# Altium PCB CSMS.PcbDoc
Units mm, origin at the board's own origin, x right, y up, seen from the top; angles counter-clockwise.
Board outline 20 x 87 mm, 2 copper layers (Top Layer, Bottom Layer), stack 1.671 mm thick; 17 components, 10 nets, 46 pads, 144 vias.
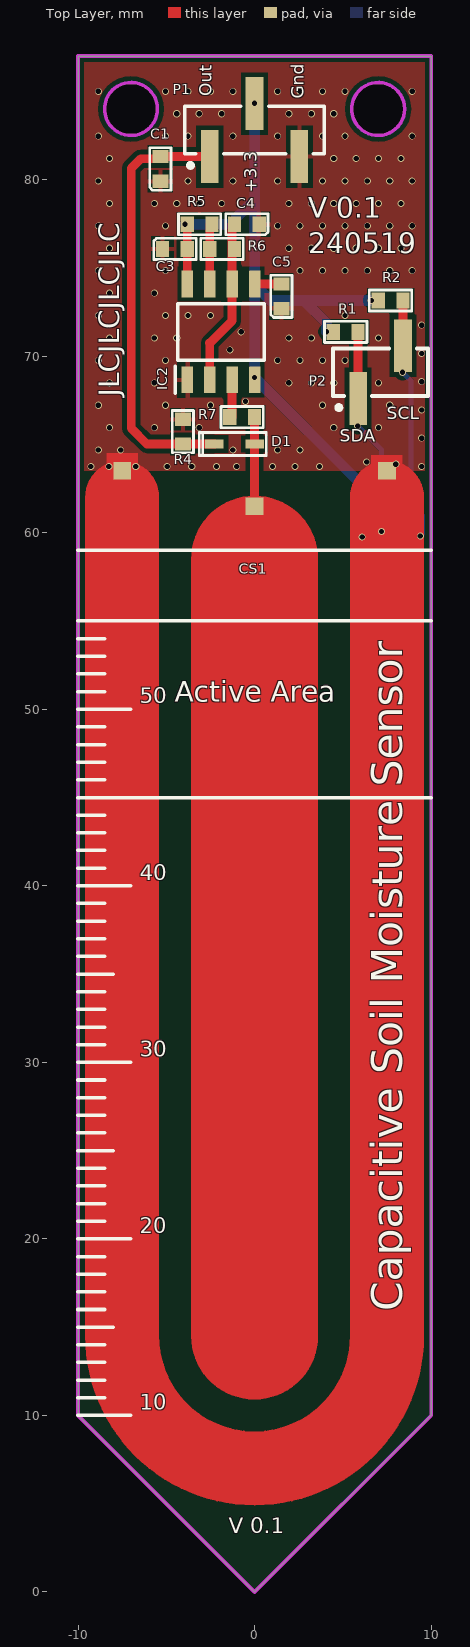
[diagram p0: Top Layer view]
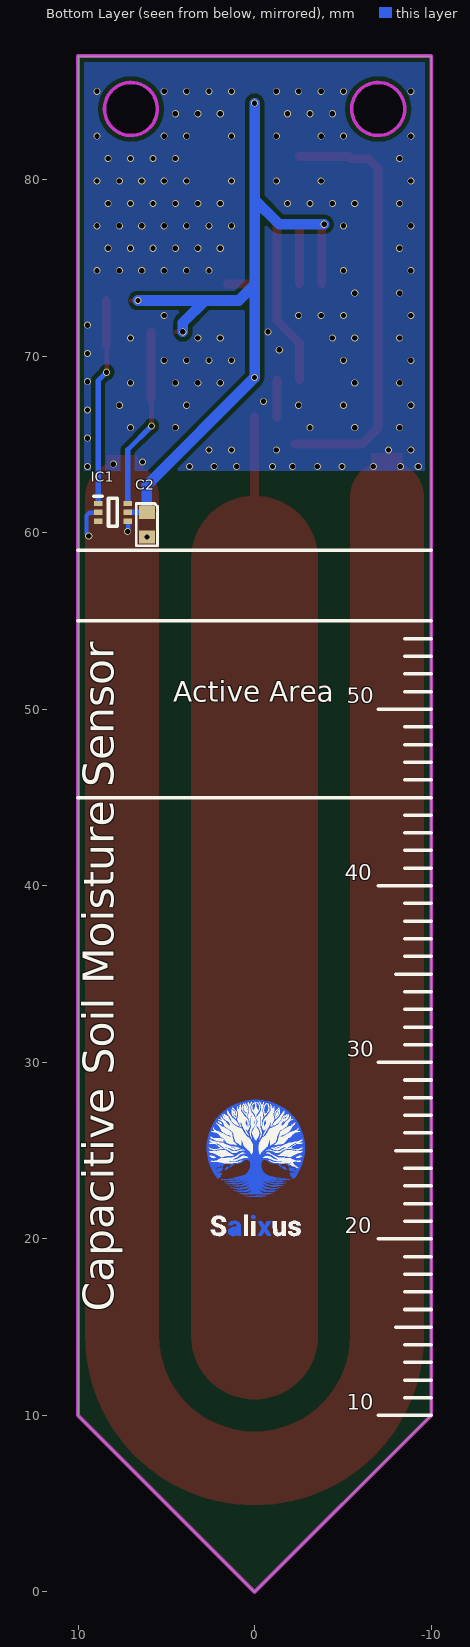
[diagram p1: Bottom Layer view, seen from below]
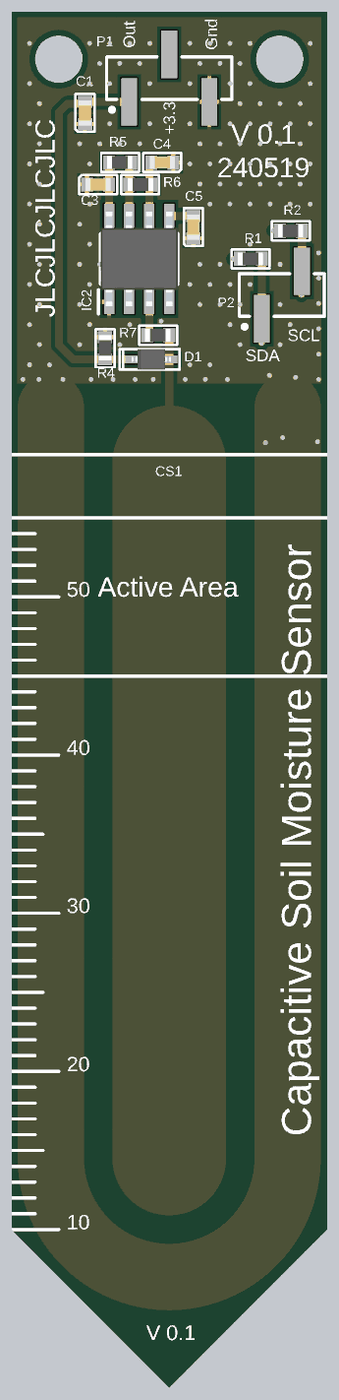
[diagram p2: 3D render of the assembled board from above, using the file's embedded part models]

## Layer stack, top to bottom
Top Solder: solder mask 0.0102, Solder Resist, Dk 3.5
Top Layer: signal copper 0.0356
Dielectric 1: dielectric 1.6, FR-4, Dk 4.8
Bottom Layer: signal copper 0.0356
Bottom Solder: solder mask 0.0102, Solder Resist, Dk 3.5

## Board outline
0,0 -10,10 -10,87 10,87 10,10
cut-out: 7,82.5 cw(c7,84) 5.5,84 cw(c7,84) 7,85.5 cw(c7,84) 8.5,84 cw(c7,84)
cut-out: -7,82.5 cw(c-7,84) -8.5,84 cw(c-7,84) -7,85.5 cw(c-7,84) -5.5,84 cw(c-7,84)

## Design rules (kind name [scope] priority, off if disabled: settings)
Clearance [All] p1: gap=0.254 ignorepadtopadclearanceinfootprint=FALSE except(0: Arc-Hole Track-Hole SMDPad-Hole THPad-Hole Via-Hole Fill-Hole Poly-Hole Region-Hole Text-Hole)
PolygonConnect [All] p1: thpad.connectstyle=Relief thpad.reliefconductorwidth=0.254 thpad.reliefentries=4 thpad.polygonreliefangle="90 Angle" thpad.airgapwidth=0.254 smdpad.connectstyle=Relief smdpad.reliefconductorwidth=0.254 smdpad.reliefentries=4 smdpad.polygonreliefangle="90 Angle" smdpad.airgapwidth=0.254 via.connectstyle=Direct via.reliefconductorwidth=0.254 via.reliefentries=4 via.polygonreliefangle="90 Angle" via.airgapwidth=0.254
RoutingVias [All] p1: holewidth=0.3 width=0.4 viastyle="Through Hole" minholewidth=0.3 minwidth=0.4 maxholewidth=0.711 maxwidth=1.27
SolderMaskExpansion [All] p1: expansion=0.102 istentingtop=FALSE
UnRoutedNet [All] p1: checkbadconnections=TRUE
Width [All] p1: maxlimit=1 minlimit=0.254 preferedwidth=0.3 minimp=50.000000 maximp=50.000000 favimp=50.000000
29 further rules are at their usual default settings.

## Classes and differential pairs
component class CSMS: C1 C2 C3 C4 C5 CS1 D1 IC1 IC2 R1 R2 R4 R5 R6 R7

## Components (designator, comment, footprint, x,y, rotation, side; value= is the part's Value field where it differs from the comment)
C1 "CL10B105KA8NNNC" "0603 CAP" -5.334,80.604 r90 top value="1uF 25VDC"
C2 "CL10B104KB8NNNC" "0603 CAP" 6.096,60.452 r270 bottom value="100nF 50VDC"
C3 "CL10B104KB8NNNC" "0603 CAP" -4.51,76.073 r0 top value="100nF 50VDC"
C4 "CL10B471KB8NNNC" "0603 CAP" -0.44,77.47 r180 top value="470pF 50VDC"
C5 "CC0603KRX7R9BB103" "0603 CAP" 1.524,73.386 r90 top value="10nF 50VDC"
CS1 "Sens" SENS 0,34.5 r0 top
D1 "1N4148WS-E3-08" SOD2513X110N -1.138,65.024 r0 top
IC1 "TMP102AIDRLR" SOTFL50P160X60-6N 8.023,61.152 r180 bottom
IC2 "TLC555CDR" SOIC127P600X175-8N -1.905,71.374 r90 top
P1 "61000318221" 61000318221 0,82.804 r0 top
P2 "61000218221" 61000218221 7.134,69.088 r0 top
R1 "0603WAF5101T5E" "0603 RES" 5.164,71.374 r180 top value="5.1K %1"
R2 "0603WAF5101T5E" "0603 RES" 7.704,73.152 r180 top value="5.1K %1"
R4 "0603SAF1004T5E" "0603 RES" -4.064,65.724 r90 top value="1M %1"
R5 "0603SAF3300T5E" "0603 RES" -3.11,77.47 r180 top value="330R %1"
R6 "0603SAF1601T5E" "0603 RES" -1.84,76.073 r0 top value="1.6K %1"
R7 "0603SAF1002T5E" "0603 RES" -0.7,66.548 r180 top value="10K %1"

## Footprints (in the part's own frame and the unit in brackets; to place one, negate y for a bottom-side part, rotate by r counter-clockwise, add the part's x,y. Pads: shape width x height; smd on the part's side, far side on the other; paste and mask are expansions set on the pad)
"0603 CAP" [mm]
  rect 0.75x0.9 smd: 1(-0.7,0) 2(0.7,0)
  silkscreen extent -1.2,-0.6 1.2,0.6, body extent -0.8,-0.4 0.8,0.4, height 0.8
"0603 RES" [mm]
  rect 0.75x0.9 smd: 1(-0.7,0) 2(0.7,0)
  silkscreen extent -1.2,-0.6 1.2,0.6, body extent -0.77,-0.4 0.83,0.4, height 0.45
61000218221 [mm] "Pin Header, pitch 2.54 mm, SMD, Vertical, single row, 2p"
  rect 1x3 smd: 1(-1.27,-1.5) 2(1.27,1.5)
  silkscreen extent -2.69,-2.12 2.69,1.35
61000318221 [mm] "Pin Header, pitch 2.54 mm, SMD, Vertical, single row, 6p"
  rect 1x3 smd: 1(-2.54,-1.5) 2(0,1.5) 3(2.54,-1.5)
  silkscreen extent -3.96,-2.12 3.96,1.35
SENS [mm]
  rect 1x1 smd paste-2539.97 mask+0.102: 1(0,27) 2(-7.5,29) 2(7.5,29)
  Top Layer region: -3.5,-20 -3.153,-21.519 -2.182,-22.736 -0.779,-23.412 0.779,-23.412 2.182,-22.736 3.153,-21.519 3.5,-20 3.5,-20 3.5,24 3.153,25.519 2.182,26.736 0.779,27.412 -0.779,27.412 -2.182,26.736 -3.153,25.519 -3.5,24 -3.5,24
  Top Layer region: -9.5,-20 -9.5,27.5 -9.302,28.368 -8.747,29.064 -7.945,29.45 -7.055,29.45 -6.253,29.064 -5.698,28.368 -5.5,27.5 -5.5,27.5 -5.5,-20 -4.955,-22.386 -3.429,-24.3 -1.224,-25.362 1.224,-25.362 3.429,-24.3 4.955,-22.386 5.5,-20 5.5,-20 5.5,27.5 5.698,28.368 6.253,29.064 7.055,29.45 7.945,29.45 8.747,29.064 9.302,28.368 9.5,27.5 9.5,27.5 9.5,-20 8.559,-24.122 5.923,-27.427 2.114,-29.262 -2.114,-29.262 -5.923,-27.427 -8.559,-24.122 -9.5,-20
  Top Layer lines w0.2: -9.5,-20 ccw(c0,-20) 9.5,-20 9.5,25.317 9.5,27.5 ccw(c7.5,27.5) 5.5,27.5 5.5,-20 cw(c0,-20) -5.5,-20 -5.5,27.5 ccw(c-7.5,27.5) -9.5,27.5 -9.5,-20 ; -3.5,-20 ccw(c0,-20) 3.5,-20 3.5,24 ccw(c0,24) 0,27.5 ccw(c0,24) -3.5,24 -3.5,-20
SOD2513X110N [mm]
  rect 1.05x0.5 smd: 1(-1.138,0) 2(1.138,0)
  silkscreen extent -2,-0.65 1.8,0.65, body extent -1.25,-0.65 1.25,0.65, height 1.1
SOIC127P600X175-8N [mm]
  rect 1.525x0.65 smd: 1(-2.712,1.905) 2(-2.712,0.635) 3(-2.712,-0.635) 4(-2.712,-1.905) 5(2.712,-1.905) 6(2.712,-0.635) 7(2.712,0.635) 8(2.712,1.905)
  silkscreen extent -3.47,-2.45 1.6,2.58, body extent -3,-2.45 3,2.45, height 1.75
SOTFL50P160X60-6N [mm]
  rect 0.475x0.3 smd: 1(-0.838,0.5) 2(-0.838,0) 3(-0.838,-0.5) 4(0.838,-0.5) 5(0.838,0) 6(0.838,0.5)
  silkscreen extent -1.07,-0.8 0.25,0.9, body extent -0.8,-0.8 0.8,0.8, height 0.6

## Part data
C1: "1uF 25VDC ±10% X7R MLCC 0603", Ozdisan Price/Stock=https://ozdisan.com/Product/Detail/522144/CL10A106MO8NQNC, Supplier 1=Ozdisan, Supplier 2=Digi-Key, Supplier Part Number 1=CL10B105KA8NNNC, Supplier Part Number 2=1276-1184-1-ND
C2 C3: "100nF 50VDC ±10% X7R MLCC 0603", Supplier Part Number 1=1276-1000-1-ND, Ozdisan Price/Stock=https://ozdisan.com/Product/Detail/522144/CL10A106MO8NQNC, Supplier 1=Digi-Key
C4: "470pF 50VDC ±10% X7R MLCC 0603", Supplier Part Number 1=187-CL10B471KB8NNNC, Ozdisan Price/Stock=https://ozdisan.com/Product/Detail/522144/CL10A106MO8NQNC, Supplier 1=Mouser
C5: "10nF, 50 V, ± 10%, X7R, 0603, Multilayer Ceramic Capacitor,", Supplier Part Number 1=603-CC603KRX7R9BB103, Ozdisan Price/Stock=https://ozdisan.com/Product/Detail/522144/CL10A106MO8NQNC, Supplier 1=Mouser
CS1: "Pcb Sens"
D1: "Diode", Manufacturer_Name=Vishay, Mouser Part Number=78-1N4148WS-E3-08, Arrow Part Number=1N4148WS-E3-08, Arrow Price/Stock=https://www.arrow.com/en/products/1n4148ws-e3-08/vishay?region=europe, Datasheet Link=https://datasheet.datasheetarchive.com/originals/distributors/Datasheets-DGA23/1390442.pdf, Height=1.15mm, Manufacturer_Part_Number=1N4148WS-E3-08, Mouser Price/Stock=https://www.mouser.co.uk/ProductDetail/Vishay-Semiconductors/1N4148WS-E3-08?qs=bTzheeSci6R8fv1OBRENhQ%3D%3D, Supplier 1=Mouser, Supplier Part Number 1=78-1N4148WS-E3-08
IC1: "Integrated Circuit", Manufacturer_Name="Texas Instruments", Mouser Part Number=595-TMP102AIDRLR, Arrow Part Number=TMP102AIDRLR, Arrow Price/Stock=https://www.arrow.com/en/products/tmp102aidrlr/texas-instruments?region=nac, Datasheet Link=http://www.ti.com/lit/gpn/tmp102, Height=0.6mm, Manufacturer_Part_Number=TMP102AIDRLR, Mouser Price/Stock=https://www.mouser.co.uk/ProductDetail/Texas-Instruments/TMP102AIDRLR?qs=SUwrw6jWmlKK8eMrKfK4LA%3D%3D
IC2: "555 Astable 2.1-MHz, 250-µA, Low-Power Timer 8-SOIC 0 to 70", Manufacturer_Name="Texas Instruments", Mouser Part Number=595-TLC555CDR, Arrow Part Number=TLC555CDR, Arrow Price/Stock=https://www.arrow.com/en/products/tlc555cdr/texas-instruments?region=nac, Datasheet Link=https://www.ti.com/lit/ds/symlink/tlc555.pdf?ts=1599218356509&ref_url=https%253A%252F%252Fwww.ti.com%252Fstore%252Fti%252Fen%252Fp%252Fproduct%252F%253Fp%253DTLC555CDR%2526keyMatch%253DTLC555CDR%2526tisearch%253DSearch-EN-everything%2526usecase%253DOPN, Height=1.75mm, Manufacturer_Part_Number=TLC555CDR, Mouser Price/Stock=https://www.mouser.co.uk/ProductDetail/Texas-Instruments/TLC555CDR?qs=gb35HGp1gQImgWgRW%252BGYaw%3D%3D, Supplier 1=Mouser, Supplier Part Number 1=595-TLC555CDR
P1 P2: "WR-PHD Pin Header, THT, Angled, pitch 2.54mm, 1 Row, 3P", Contact Resistance=20mΩ, Manufacturer="Wurth Elektronik", Manufacturer Part Number=61300311021, Operating Temperature Max=105°C, Operating Temperature Min=-40°C, Rated Current=3A, Supplier Part Number 1=732-5336-ND, Withstanding Voltage=500V, Working Voltage=250V, Category="Board-to-Board Connectors", ComponentLink1Description="Website Link", ComponentLink1URL=https://www.we-online.com/redexpert/article/61300311021?ad, ComponentLink2Description="Datasheet Link", ComponentLink2URL=https://www.we-online.com/redexpert/spec/61300311021?ad, Gender="Pin Header", Match Code=WR-PHD, Mount="Through Hole", Number of Pins=3, Number of Rows=1, Orientation=Angled, Packaging=Bag, Pitch=2.54mm, Supplier 1=Digi-Key
R1 R2: "5.1 K Ohms 1% 1/10W-S 100PPM RES 0603", JLCPCB Part #=C23186, Supplier Part Number 1=39P9958, Ozdisan Price/Stock=https://ozdisan.com/Product/Detail/522144/CL10A106MO8NQNC, Supplier 1=Avnet
R4: "1M Ohms 1% 1/10W-S 100PPM RES 0603", Supplier Part Number 1=79M5904, Ozdisan Price/Stock=https://ozdisan.com/Product/Detail/522144/CL10A106MO8NQNC, Supplier 1=Newark
R5: "330R Ohms 1% 1/10W-S 100PPM RES 0603", Supplier Part Number 1=603-RC0603FR-07330RL, Ozdisan Price/Stock=https://ozdisan.com/Product/Detail/522144/CL10A106MO8NQNC, Supplier 1=Mouser
R6: "1.6K Ohms 1% 1/10W-S 100PPM RES 0603", Supplier Part Number 1=39P9958, Ozdisan Price/Stock=https://ozdisan.com/Product/Detail/522144/CL10A106MO8NQNC, Supplier 1=Avnet
R7: "10K Ohms 1% 1/10W-S 100PPM RES 0603", Supplier Part Number 1=1632392, Ozdisan Price/Stock=https://ozdisan.com/Product/Detail/522144/CL10A106MO8NQNC, Supplier 1=Farnell

## Via types
v1: diameter 0.4, hole 0.3, Top Layer to Bottom Layer, tented both sides, 144 vias

## Nets (pads, with @x,y where several pads share a name; then routed paths per layer and width w, separated by ;. In a path a pad name is that pad's centre, name@x,y a point inside that pad or via, vN(x,y) a via of type N, cw(c..) or ccw(c..) an arc to the next point about the centre after c; other vN are vias at no path point)
+3.3: C2.1 C3.2 IC1.5 IC2.4 IC2.8 P1.2 R1.2 R2.2 R5.2 | length 44.8
  Top Layer w0.254: v1(4.064,71.374) R1.2 ; v1(6.604,73.152) R2.2
  Top Layer w0.5: IC2.8 C3.2 R5.2
  Bottom Layer w0.3: C2.1 IC1.5
  Bottom Layer w0.6: v1(-3.94,77.47) -1.397,77.47 0,78.867 ; v1(0,84.328) 0,78.867 ; v1(4.064,71.374) 4.064,71.882 2.794,73.152 ; C2.1 6.096,62.696 v1(0,68.792) 0,74.041 ; v1(6.604,73.152) 2.794,73.152 ; 0,74.041 0,78.867 ; 0,74.041 0.889,73.152 2.794,73.152
GND: C1.1 C2.2 C3.1 C4.1 C5.1 CS1.2 IC1.2 IC1.4 IC2.1 P1.3 R4.2 | length 2.5
  Bottom Layer w0.25: IC1.2 8.892,61.121 9.37,61.121 9.519,60.972 9.519,59.944 v1(9.392,59.817)
  Bottom Layer w0.254: v1(7.185,60.071) 7.157,60.099 7.157,60.624 IC1.4
  other v1: 6.096,59.752 -9.271,63.754 -8.255,63.754 -6.731,63.754 -4.953,63.754 -3.556,63.754 -2.159,63.754 -1.016,63.754 1.016,63.754 2.286,63.754 3.683,63.754 9.465,63.754 8.001,63.881 6.35,64.008 -8.851,64.68 -7.581,64.68 -1.231,64.68 1.309,64.68 2.579,64.68 9.465,65.354 -8.216,65.95 -5.676,65.95 -3.136,65.95 4.484,65.95 7.024,65.95 9.465,66.954 -8.851,67.22 -5.041,67.22 -2.501,67.22 3.849,67.22 7.659,67.22 -0.508,67.437 -8.216,68.49 -5.676,68.49 1.944,68.49 3.214,68.49 4.484,68.49 7.024,68.49 9.465,68.555 -8.851,69.76 -5.041,69.76 1.309,69.76 2.579,69.76 3.849,69.76 5.119,69.76 9.465,70.155 -1.397,70.358 -8.216,71.03 -5.676,71.03 -4.406,71.03 1.944,71.03 3.214,71.03 7.024,71.03 -0.762,71.374 9.465,71.755 -8.851,72.3 -5.041,72.3 -3.771,72.3 -2.501,72.3 5.119,72.3 -8.216,73.57 -5.676,73.57 -8.851,74.84 -5.041,74.84 2.579,74.84 3.849,74.84 5.119,74.84 6.389,74.84 7.659,74.84 8.929,74.84 -8.216,76.11 1.944,76.11 3.214,76.11 4.484,76.11 5.754,76.11 7.024,76.11 8.294,76.11 -8.851,77.38 -5.041,77.38 1.309,77.38 2.579,77.38 3.849,77.38 5.119,77.38 6.389,77.38 7.659,77.38 8.929,77.38 -8.216,78.65 -5.676,78.65 -4.406,78.65 -3.136,78.65 -1.866,78.65 1.944,78.65 3.214,78.65 4.484,78.65 5.754,78.65 7.024,78.65 8.294,78.65 -8.851,79.92 -3.771,79.92 -1.231,79.92 1.309,79.92 3.849,79.92 5.119,79.92 6.389,79.92 7.659,79.92 8.929,79.92 -8.216,81.19 4.484,81.19 5.754,81.19 7.024,81.19 8.294,81.19 -8.851,82.46 -5.041,82.46 -3.771,82.46 -1.231,82.46 1.309,82.46 3.849,82.46 5.119,82.46 8.929,82.46 -4.406,83.73 -3.136,83.73 -1.866,83.73 1.944,83.73 3.214,83.73 4.484,83.73 -8.851,85 -5.041,85 -3.771,85 -2.501,85 -1.231,85 1.309,85 2.579,85 3.849,85 5.119,85 8.929,85
NetC4_2: C4.2 IC2.2 IC2.6 R6.2 | length 9.2
  Top Layer w0.5: -2.543,70.736 -1.273,72.006 ; IC2.2 -2.54,70.736 ; -1.27,72.006 IC2.6 C4.2@-1.27,77.265 ; C4.2@-1.27,77.395 C4.2@-1.27,77.47
NetC5_2: C5.2 IC2.5 | length 1.5
  Top Layer w0.5: IC2.5@-0.003,74.086 C5.2
NetCS1_1: CS1.1 D1.2 R7.1 | length 5
  Top Layer w0.5: CS1.1 0,62 D1.2 R7.1
NetR5_1: IC2.7 R5.1 R6.1 | length 3.4
  Top Layer w0.5: IC2.7 R6.1 R5.1@-2.54,77.47
NetR7_2: IC2.3 R7.2 | length 2.1
  Top Layer w0.5: R7.2@-1.27,66.548 IC2.3
SCL: IC1.1 P2.2 R2.1 | length 11.7
  Top Layer w0.254: v1(8.382,69.088) 8.382,70.566 P2.2
  Top Layer w0.5: P2.2 R2.1
  Bottom Layer w0.3: v1(8.382,69.088) 8.861,68.609 IC1.1
SDA: IC1.6 P2.1 R1.1 | length 10.3
  Top Layer w0.3: v1(5.842,66.04) 5.842,67.566 P2.1
  Top Layer w0.5: P2.1 R1.1
  Bottom Layer w0.3: v1(5.842,66.04) 7.185,64.697 IC1.6
SensOut: C1.2 D1.1 P1.1 R4.1 | length 24.5
  Top Layer w0.5: P1.1 C1.2 -5.459,81.179 -6.451,81.179 -6.985,80.645 -6.985,65.913 -6.096,65.024 R4.1 D1.1
pads on no net: IC1.3

## Polygon pours and split planes (outlines as drawn)
GND on Top Layer "NONET_L-01_P-001" (solid, remove dead copper, pour order 1): 10,87 -10,87 -10,63.5 10,63.5
GND on Bottom Layer "NONET_L-01_P-001" (solid, pour order 0): -10,87 10,87 10,63.5 -10,63.5

## Keep-outs
Keep-Out Layer:
  circle w0.2: c-7,84 r1.5
  circle w0.2: c7,84 r1.5
  lines w0.2: -10,10 -10,87 10,87 10,10 0,0 -10,10

## Other copper
Top Layer:
  rectangle net GND: 6.604,63.754 8.382,64.389
  rectangle net GND: -8.382,63.754 -6.604,64.516
  pour cut-out: 0.82,72.934 0.82,73.81 2.228,73.81 2.228,72.934
  pour cut-out: -1.152,67.252 -0.276,67.252 -0.276,65.844 -1.152,65.844
  pour cut-out: 7.252,73.856 8.128,73.856 8.128,72.448 7.252,72.448
  pour cut-out: 4.712,72.078 5.588,72.078 5.588,70.67 4.712,70.67
  pour cut-out: -0.889,77.216 -0.127,77.216 -0.127,76.835 -0.889,76.835
  pour cut-out: -0.892,78.174 -0.13,78.174 -0.13,77.793 -0.892,77.793
  pour cut-out: -3.429,78.105 -2.667,78.105 -2.667,77.724 -3.429,77.724
Bottom Layer:
  region: 719 vertices and 0 holes, not listed, extent -2.842,22.517 2.705,27.883
  region: 1.477,20.304 1.449,20.26 1.412,20.223 1.366,20.193 1.312,20.17 1.272,20.163 1.208,20.162 1.152,20.166 1.111,20.174 1.074,20.191 1.035,20.218 1.006,20.238 1.001,20.236 0.998,20.228 0.986,20.193 0.979,20.174 0.864,20.174 0.767,20.176 0.754,20.18 0.754,20.186 0.769,20.228 0.777,20.281 0.782,20.373 0.785,20.534 0.791,20.772 0.796,20.817 0.805,20.845 0.833,20.899 0.87,20.943 0.919,20.979 0.977,21.006 1.028,21.018 1.092,21.024 1.16,21.025 1.221,21.019 1.269,21.007 1.318,20.988 1.363,20.963 1.401,20.935 1.428,20.906 1.452,20.869 1.47,20.829 1.481,20.79 1.485,20.761 1.261,20.761 1.256,20.782 1.247,20.804 1.231,20.827 1.215,20.841 1.194,20.852 1.171,20.86 1.146,20.863 1.122,20.863 1.098,20.86 1.076,20.852 1.057,20.84 1.038,20.82 1.024,20.797 1.016,20.769 1.011,20.733 1.007,20.686 1.121,20.682 1.216,20.676 1.277,20.667 1.35,20.641 1.409,20.604 1.433,20.583 1.453,20.559 1.47,20.533 1.483,20.505 1.495,20.457 1.497,20.402 1.491,20.348
  region: 1.696,23.931 1.689,23.927 1.675,23.925 1.632,23.928 1.582,23.939 1.537,23.955 1.513,23.971 1.489,23.994 1.467,24.023 1.449,24.054 1.437,24.081 1.437,24.094 1.452,24.098 1.486,24.096 1.53,24.09 1.565,24.077 1.599,24.054 1.636,24.018 1.688,23.958 1.697,23.941
  region: -1.583,24.038 -1.569,24.07 -1.569,24.081 -1.574,24.089 -1.583,24.094 -1.598,24.097 -1.643,24.097 -1.68,24.091 -1.711,24.076 -1.743,24.047 -1.786,24.001 -1.824,23.956 -1.84,23.931 -1.83,23.925 -1.803,23.925 -1.766,23.929 -1.724,23.938 -1.673,23.954 -1.637,23.973 -1.608,24
  region: 0.523,22.436 0.485,22.426 0.413,22.412 0.312,22.398 0.087,22.378 -0.02,22.376 -0.161,22.379 -0.299,22.384 -0.398,22.391 -0.561,22.414 -0.618,22.425 -0.639,22.433 -0.477,22.431 -0.361,22.431 -0.266,22.434 -0.189,22.442 -0.127,22.454 -0.082,22.461 -0.022,22.451 0.126,22.429 0.239,22.424 0.46,22.433
  region: -1.911,20.369 -1.939,20.305 -1.976,20.261 -2.024,20.222 -2.081,20.191 -2.143,20.17 -2.198,20.163 -2.267,20.161 -2.337,20.165 -2.395,20.174 -2.45,20.192 -2.498,20.217 -2.539,20.248 -2.571,20.283 -2.594,20.323 -2.609,20.367 -2.614,20.413 -2.609,20.462 -2.597,20.501 -2.578,20.536 -2.552,20.568 -2.518,20.595 -2.477,20.62 -2.428,20.642 -2.37,20.66 -2.305,20.676 -2.229,20.695 -2.179,20.717 -2.162,20.73 -2.15,20.744 -2.143,20.76 -2.141,20.777 -2.144,20.798 -2.154,20.82 -2.167,20.839 -2.182,20.851 -2.223,20.864 -2.271,20.867 -2.316,20.859 -2.334,20.852 -2.348,20.843 -2.374,20.809 -2.382,20.791 -2.385,20.775 -2.387,20.767 -2.401,20.763 -2.499,20.761 -2.613,20.761 -2.608,20.799 -2.599,20.837 -2.585,20.872 -2.563,20.905 -2.534,20.936 -2.481,20.975 -2.419,21.003 -2.347,21.02 -2.265,21.026 -2.184,21.021 -2.114,21.005 -2.053,20.977 -2.001,20.938 -1.968,20.902 -1.945,20.863 -1.932,20.82 -1.928,20.771 -1.931,20.718 -1.947,20.675 -1.962,20.65 -1.981,20.626 -2.004,20.605 -2.032,20.586 -2.104,20.551 -2.2,20.519 -2.3,20.49 -2.359,20.465 -2.376,20.453 -2.387,20.439 -2.393,20.424 -2.394,20.406 -2.392,20.385 -2.385,20.366 -2.373,20.35 -2.356,20.337 -2.336,20.327 -2.311,20.32 -2.251,20.317 -2.199,20.326 -2.157,20.346 -2.142,20.36 -2.129,20.376 -2.12,20.395 -2.115,20.415 -2.111,20.44 -2.004,20.44 -1.919,20.438 -1.901,20.435 -1.896,20.431 -1.9,20.404
  region: -1.081,20.286 -1.114,20.237 -1.159,20.2 -1.214,20.173 -1.26,20.163 -1.334,20.162 -1.412,20.168 -1.435,20.174 -1.46,20.186 -1.496,20.208 -1.523,20.229 -1.548,20.251 -1.553,20.24 -1.555,20.214 -1.558,20.178 -1.664,20.176 -1.771,20.174 -1.771,21.012 -1.547,21.012 -1.547,20.419 -1.524,20.393 -1.498,20.369 -1.467,20.352 -1.43,20.342 -1.387,20.34 -1.352,20.342 -1.326,20.349 -1.306,20.363 -1.286,20.386 -1.278,20.403 -1.273,20.444 -1.269,20.709 -1.267,21.012 -1.044,21.012 -1.044,20.703 -1.046,20.436 -1.05,20.381 -1.057,20.347
  region: -0.291,20.176 -0.41,20.178 -0.481,20.305 -0.556,20.432 -0.632,20.303 -0.705,20.174 -0.947,20.174 -0.937,20.19 -0.795,20.434 -0.73,20.553 -0.704,20.607 -0.82,20.812 -0.933,21.008 -0.815,21.012 -0.697,21.012 -0.628,20.89 -0.555,20.768 -0.486,20.887 -0.438,20.972 -0.413,21.009 -0.292,21.011 -0.179,21.009 -0.295,20.81 -0.411,20.603 -0.291,20.389 -0.172,20.178
  region: 0.173,21.173 0.155,21.151 0.129,21.133 0.095,21.119 0.054,21.118 0.008,21.128 -0.011,21.137 -0.027,21.149 -0.039,21.164 -0.049,21.182 -0.058,21.227 -0.057,21.264 -0.045,21.291 -0.025,21.315 -0.004,21.332 0.022,21.341 0.054,21.346 0.083,21.345 0.109,21.34 0.132,21.331 0.151,21.318 0.167,21.302 0.178,21.282 0.185,21.258 0.188,21.232 0.184,21.2
  region: 0.178,20.174 0.178,21.012 -0.046,21.012 -0.046,20.174
  region: 0.597,20.174 0.597,21.368 0.373,21.368 0.373,20.174
  region: 2.433,20.354 2.456,20.399 2.471,20.447 2.482,20.511 2.482,20.531 2.248,20.527 2.244,20.492 2.234,20.45 2.216,20.416 2.187,20.387 2.147,20.362 2.127,20.353 2.106,20.348 2.028,20.345 1.949,20.348 1.929,20.354 1.909,20.364 1.889,20.378 1.873,20.395 1.86,20.414 1.852,20.435 1.847,20.457 1.847,20.481 1.852,20.504 1.86,20.528 1.881,20.559 1.921,20.587 1.998,20.621 2.129,20.67 2.197,20.697 2.255,20.726 2.305,20.757 2.348,20.792 2.384,20.83 2.411,20.87 2.43,20.912 2.442,20.959 2.446,21.017 2.438,21.072 2.419,21.124 2.39,21.171 2.35,21.213 2.3,21.25 2.242,21.28 2.175,21.303 2.116,21.313 2.024,21.316 1.926,21.312 1.896,21.306 1.86,21.294 1.787,21.262 1.728,21.222 1.68,21.172 1.644,21.114 1.629,21.074 1.62,21.037 1.612,20.986 1.609,20.97 1.846,20.97 1.846,20.991 1.849,21.014 1.857,21.038 1.869,21.062 1.883,21.081 1.912,21.104 1.948,21.12 1.993,21.129 2.047,21.132 2.081,21.129 2.112,21.123 2.14,21.112 2.163,21.099 2.183,21.082 2.197,21.062 2.207,21.04 2.211,21.015 2.209,20.987 2.202,20.962 2.188,20.94 2.166,20.919 2.135,20.899 2.094,20.879 1.977,20.835 1.854,20.787 1.803,20.762 1.76,20.736 1.723,20.708 1.693,20.678 1.667,20.646 1.647,20.612 1.632,20.575 1.621,20.539 1.614,20.503 1.612,20.468 1.614,20.433 1.62,20.399 1.631,20.367 1.645,20.336 1.663,20.307 1.684,20.28 1.709,20.255 1.737,20.232 1.769,20.212 1.804,20.195 1.841,20.181 1.882,20.171 1.948,20.162 2.027,20.161 2.106,20.165 2.171,20.175 2.228,20.192 2.28,20.215 2.327,20.243 2.369,20.275 2.404,20.312

## Silkscreen, mask and mechanical layers (free items; w line width, h text height)
Top Overlay:
  lines w0.2: -10,10 -7,10 ; -10,11 -8.5,11 ; -10,12 -8.5,12 ; -10,13 -8.5,13 ; -10,14 -8.5,14 ; -10,15 -8,15 ; -10,16 -8.5,16 ; -10,17 -8.5,17 ; -10,18 -8.5,18 ; -10,19 -8.5,19 ; -10,20 -7,20 ; -10,21 -8.5,21 ; -10,22 -8.5,22 ; -10,23 -8.5,23 ; -10,24 -8.5,24 ; -10,25 -8,25 ; -10,26 -8.5,26 ; -10,27 -8.5,27 ; -10,28 -8.5,28 ; -10,29 -8.5,29 ; -10,30 -7,30 ; -10,31 -8.5,31 ; -10,32 -8.5,32 ; -10,33 -8.5,33 ; -10,34 -8.5,34 ; -10,35 -8,35 ; -10,36 -8.5,36 ; -10,37 -8.5,37 ; -10,38 -8.5,38 ; -10,39 -8.5,39 ; -10,40 -7,40 ; -10,41 -8.5,41 ; -10,42 -8.5,42 ; -10,43 -8.5,43 ; -10,44 -8.5,44 ; -10,45 10,45 ; -10,46 -8.5,46 ; -10,47 -8.5,47 ; -10,48 -8.5,48 ; -10,49 -8.5,49 ; -10,50 -7,50 ; -10,51 -8.5,51 ; -10,52 -8.5,52 ; -10,53 -8.5,53 ; -10,54 -8.5,54 ; -10,55 10,55 ; -10,59 10,59
  text "Out" at -2.172,84.709 h1.2 r90
  text "Gnd" at 3.035,84.582 h1.2 r90
  text "+3.3" at 0.367,79.248 h1.2 r90
  text "V 0.1 / 240519" at 3.053,75.438 h2
  text "JLCJLCJLCJLC" at -7.26,67.687 h2 r90
  text "SCL" at 7.493,66.18 h1.2
  text "SDA" at 4.826,64.91 h1.2
  text "50" at -6.5,50.016 h1.52
  text "Active Area" at -4.533,50.02 h2
  text "40" at -6.5,40.016 h1.52
  text "30" at -6.5,30.018 h1.52
  text "20" at -6.501,20.009 h1.5
  text "Capacitive Soil Moisture Sensor" at 8.967,15.889 h3 r90
  text "10" at -6.5,10.016 h1.5
  text "V 0.1" at -1.46,3.016 h1.52
Bottom Overlay:
  drawing of 74 lines, arcs and shapes, not listed
  text "50" at -5.23,50.016 h1.52
  text "Active Area" at 4.613,50.02 h2
  text "40" at -5.103,40.016 h1.52
  text "30" at -5.23,30.018 h1.52
  text "20" at -5.102,20.009 h1.5
  text "Capacitive Soil Moisture Sensor" at 7.391,15.875 h3 r270
  text "10" at -5.23,10.016 h1.5
Bottom Solder:
  drawing of 87 lines, arcs and shapes, not listed
Mechanical 1:
  region: 16.692,87.046 16.184,90.348 17.2,90.348
  region: 17.2,80.744 16.184,80.744 16.692,84.046
  region: -10,92.688 -13.302,92.18 -13.302,93.196
  region: -3.698,92.18 -7,92.688 -3.698,93.196
  region: 10.302,90.176 7,90.684 10.302,91.192
  region: -7,90.684 -10.302,90.176 -10.302,91.192
  region: -22.132,10 -22.64,13.302 -21.624,13.302
  region: -21.624,83.5 -22.64,83.5 -22.132,86.802
  region: -21.595,-3.302 -22.611,-3.302 -22.103,0
  region: -22.103,10 -22.611,13.302 -21.595,13.302
  region: -10,99.031 -13.302,98.523 -13.302,99.539
  region: 13.302,98.523 10,99.031 13.302,99.539
  region: -7.307,85.462 -10.126,87.255 -9.457,88.02
  region: -34.881,0 -35.389,3.302 -34.373,3.302
  region: -34.373,83.5 -35.389,83.5 -34.881,86.802
  region: 24.893,60.5 23.877,60.5 24.385,63.802
  region: 24.385,0 23.877,3.302 24.893,3.302
  lines w0.2: -38.056,0 -1.27,0 -25.278,0 ; -37.04,87 -10.254,87 ; -34.881,0 -34.881,39.63 ; -34.881,44.671 -34.881,87 ; -25.307,10 -11.27,10 -25.278,10 ; -22.132,10 -22.132,27.897 ; -22.132,32.937 -22.132,87 ; -22.103,-6.35 -22.103,0 ; -22.103,10 -22.103,16.35 ; -16.35,92.688 -10,92.688 ; -16.35,99.031 -10,99.031 ; -16.257,91.617 -11.559,87.505 -9.806,87.621 ; -13.35,90.684 -7,90.684 ; -10,95.863 -10,88.316 -10,102.206 ; -7,92.688 -0.65,92.688 ; -7,93.859 -7,85.316 -7,95.863 ; 1.27,0 27.56,0 ; 7,85.316 7,93.859 ; 7,90.684 13.35,90.684 ; 8.27,84.046 19.867,84.046 ; 10,88.316 10,102.206 ; 10,99.031 16.35,99.031 ; 11.27,64 27.56,64 ; 11.27,87.046 19.867,87.046 ; 16.692,77.696 16.692,84.046 ; 16.692,87.046 16.692,93.396 ; 24.385,0 24.385,29.333 ; 24.385,34.373 24.385,64
  text "20,00" at -3.051,100.351 h3.17
  text "3,00" at -10.16,96.033 h3.17
  text "14,00" at -0.508,91.715 h3.17
  text "3,00" at -21.082,89.048 h3.17
  text "3,00" at 13.843,84.857 h3.17
  text "87" at -36.322,41.436 h3.17
  text "64" at 22.479,31.022 h3.17
  text "77" at -23.495,29.591 h3.17
  text "10,00" at -27.582,4.025 h3.17